# EAGLE board SampleHolder5oa_PRODUCTION_JUSTHOLES (EAGLE 5.10)
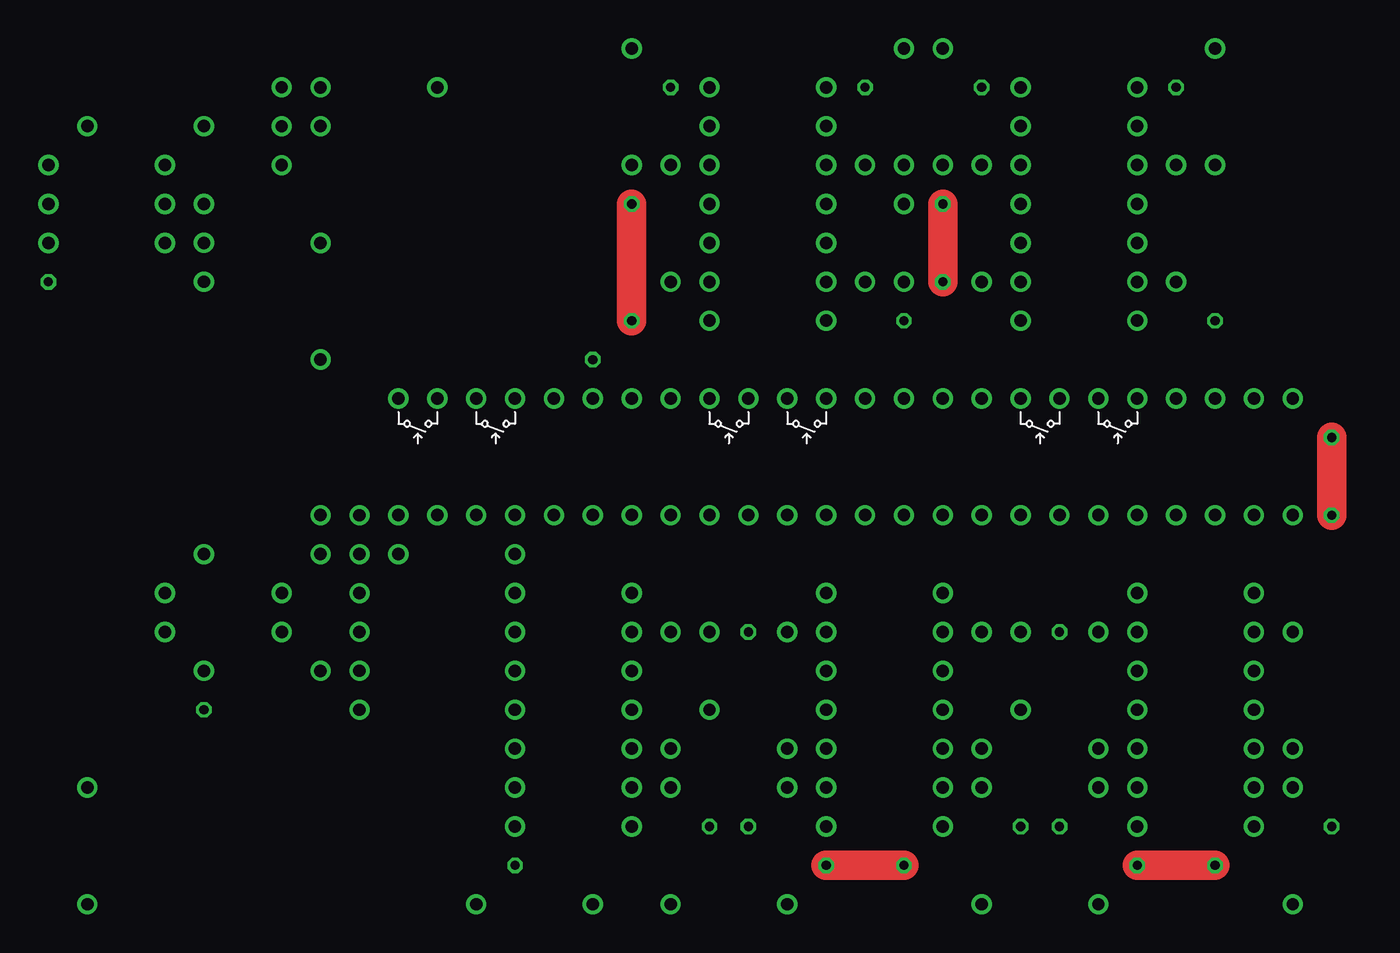
[diagram p0: board, top side]
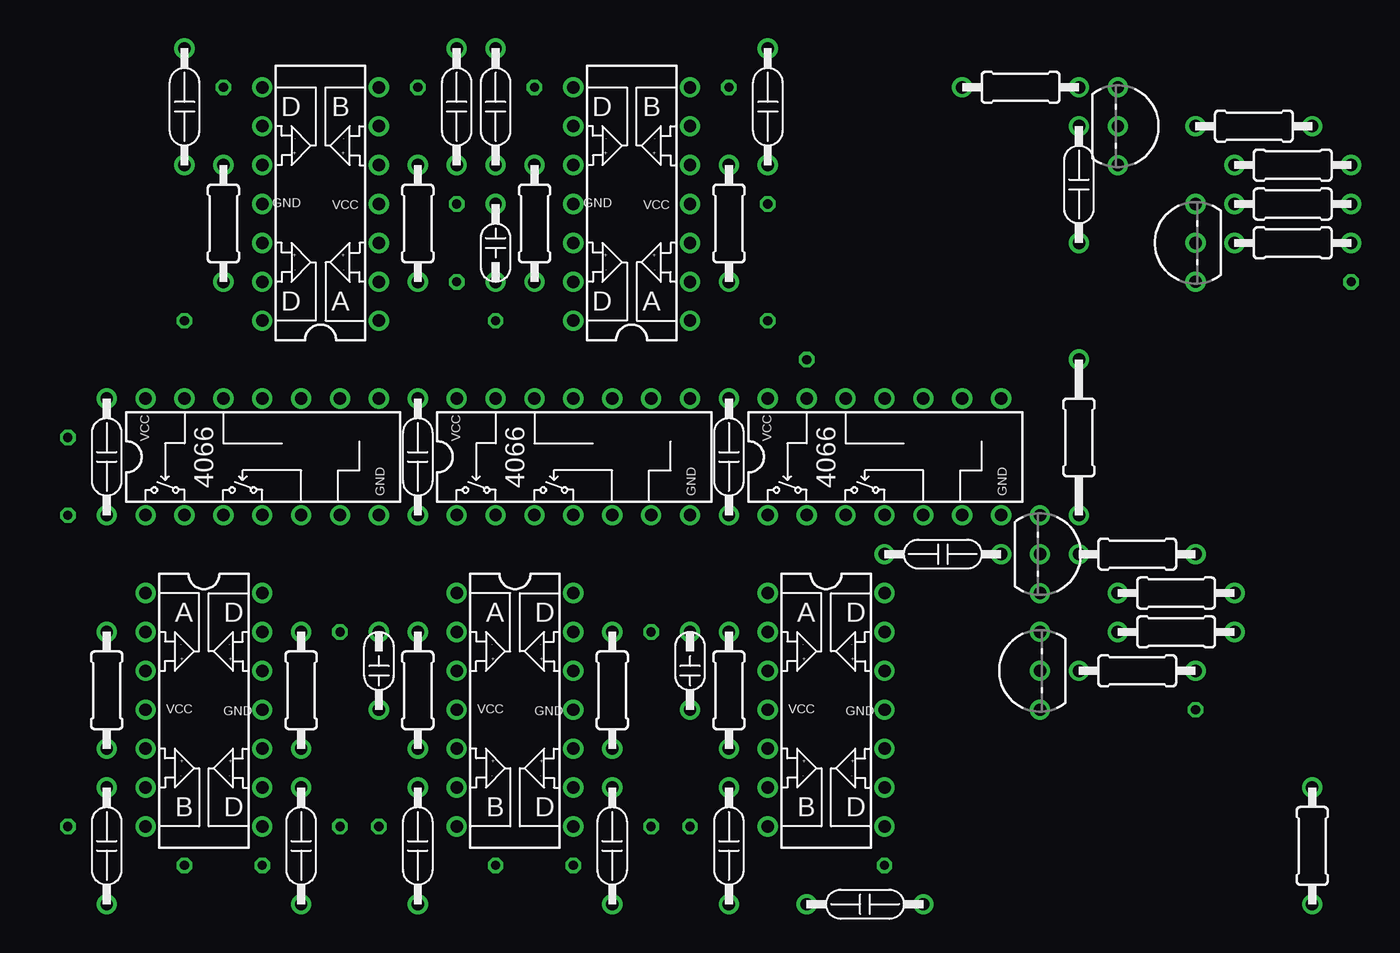
[diagram p1: board, bottom side, seen from below]

No outline drawn. Coordinates in mm, seen from the top.
Copper layers (1*16): Top 0.035mm / dielectric 1.5mm / Bottom 0.035mm
Design rules "default": minimum track width 10mil, minimum drill 24mil, track to track 8mil, track to pad 8mil, pad to pad 8mil, via to via 8mil, smd to smd 8mil, copper to edge 40mil, drill to drill 8mil, minimum pad ring 10mil, minimum via ring 8mil, stop-mask expansion 4mil, vias tented up to drill 0mil, thermal gap 10mil

## Footprints (pad centres in the part's own frame; a part is rotated, then mirrored left to right if it is on the bottom)
SMALL-CAPACITOR = drill 0.813 round: IN1 0,0; IN2 5.08,0
RESISTOR = drill 0.813 round: IN1 -3.81,0; IN2 3.81,0
TRANSISTOR = drill 0.8 round: P$1 0,0; P$2 2.54,0; P$3 -2.54,0
LM324-QUAD-OPAMP = drill 0.813 round: AMINUS -3.81,5.08; AOUT -3.81,7.62; APLUS -3.81,2.54; BMINUS -3.81,-5.08; BOUT -3.81,-7.62; BPLUS -3.81,-2.54; CMINUS 3.81,5.08; COUT 3.81,7.62; CPLUS 3.81,2.54; DMINUS 3.81,-5.08; DOUT 3.81,-7.62; DPLUS 3.81,-2.54; GND 3.81,0; VCC -3.81,0
CAPACITOR = drill 0.813 round: IN1 -2.54,0; IN2 5.08,0
4066-QUAD-SW = drill 0.813 round: A1 -3.81,7.62; A2 -3.81,2.54; A3 3.81,-5.08; A4 3.81,0; B1 -3.81,5.08; B2 -3.81,0; B3 3.81,-7.62; B4 3.81,-2.54; C1 3.81,5.08; C2 -3.81,-2.54; C3 -3.81,-5.08; C4 3.81,2.54; GND -3.81,-7.62; VCC 3.81,7.62
RESISTOR-L2 = drill 0.813 round: IN1 -5.08,0; IN2 5.08,0

## Placement (x,y rotation side)
E$1  [SMALL-CAPACITOR]  59.69,52.07 270 bottom
E$2  [RESISTOR]  6.35,10.16 90 bottom
E$3  [TRANSISTOR]  19.05,57.15 270 bottom
E$4  [TRANSISTOR]  13.97,49.53 90 bottom
E$5  [LM324-QUAD-OPAMP]  38.1,19.05 0 bottom
E$6  2k  [RESISTOR]  10.16,57.15 0 bottom
E$7  [RESISTOR]  44.45,20.32 90 bottom
E$8  10k  [RESISTOR]  7.62,54.61 0 bottom
E$9  [CAPACITOR]  44.45,11.43 270 bottom
E$10  [4066-QUAD-SW]  54.61,35.56 90 bottom
E$11  [LM324-QUAD-OPAMP]  50.8,52.07 180 bottom
E$12  [RESISTOR]  57.15,50.8 270 bottom
E$13  [RESISTOR]  44.45,50.8 270 bottom
E$14  [CAPACITOR]  59.69,57.15 90 bottom
E$15  [4066-QUAD-SW]  34.29,35.56 90 bottom
E$16  [CAPACITOR]  36.83,6.35 0 bottom
E$17  [CAPACITOR]  41.91,57.15 90 bottom
E$18  [LM324-QUAD-OPAMP]  58.42,19.05 0 bottom
E$19  [RESISTOR]  52.07,20.32 90 bottom
E$20  [RESISTOR]  64.77,20.32 90 bottom
E$21  [CAPACITOR]  52.07,11.43 270 bottom
E$22  [CAPACITOR]  64.77,11.43 270 bottom
E$23  [4066-QUAD-SW]  74.93,35.56 90 bottom
E$24  [LM324-QUAD-OPAMP]  71.12,52.07 180 bottom
E$25  [RESISTOR]  77.47,50.8 270 bottom
E$26  [RESISTOR]  64.77,50.8 270 bottom
E$27  [CAPACITOR]  80.01,57.15 90 bottom
E$28  [CAPACITOR]  62.23,57.15 90 bottom
E$29  [LM324-QUAD-OPAMP]  78.74,19.05 0 bottom
E$30  [RESISTOR]  72.39,20.32 90 bottom
E$31  [RESISTOR]  85.09,20.32 90 bottom
E$32  [CAPACITOR]  72.39,11.43 270 bottom
E$33  [CAPACITOR]  85.09,11.43 270 bottom
E$34  [CAPACITOR]  64.77,36.83 270 bottom
E$35  [CAPACITOR]  44.45,36.83 270 bottom
E$36  [CAPACITOR]  85.09,36.83 270 bottom
E$37  [SMALL-CAPACITOR]  46.99,19.05 90 bottom
E$38  [SMALL-CAPACITOR]  67.31,19.05 90 bottom
E$39  2k  [RESISTOR]  25.4,59.69 180 bottom
E$40  [RESISTOR-L2]  21.59,36.83 90 bottom
E$41  10k  [RESISTOR]  7.62,49.53 0 bottom
E$42  10k  [RESISTOR]  7.62,52.07 0 bottom
E$43  [TRANSISTOR]  24.13,29.21 270 bottom
E$44  [TRANSISTOR]  24.13,21.59 90 bottom
E$45  2k  [RESISTOR]  17.78,29.21 0 bottom
E$46  10k  [RESISTOR]  15.24,26.67 0 bottom
E$48  [CAPACITOR]  29.21,29.21 180 bottom
E$49  10k  [RESISTOR]  17.78,21.59 0 bottom
E$50  10k  [RESISTOR]  15.24,24.13 0 bottom
E$51  [CAPACITOR]  21.59,54.61 270 bottom

## Library data of the parts
E$1-E$46 E$48-E$51 = RussellLibrary

## Nets
S$14: E$41.IN2

## Tracks (layer width: path | path; a pad name or v marks a point on that pad's centre or on a via)
S$3  (via drill 0.6)
  other vias: 13.97,19.05
S$6  (via drill 0.6)
  other vias: 3.81,46.99
S$9  (via drill 0.6)
  other vias: 34.29,8.89
S$14  (via drill 0.6)
  other vias: 3.81,49.53
S$16  (via drill 0.6)
  other vias: 46.99,11.43
S$17  (via drill 0.6)
  other vias: 49.53,24.13
S$18  (via drill 0.6)
  other vias: 59.69,44.45
S$19  (via drill 0.6)
  Top 1.93: v54.61,8.89 v59.69,8.89
S$24  (via drill 0.6)
  other vias: 44.45,59.69
S$32  (via drill 0.6)
  other vias: 64.77,59.69
S$39  (via drill 0.6)
  other vias: 39.37,41.91
S$41  (via drill 0.6)
  other vias: 49.53,11.43
S$42  (via drill 0.6)
  Top 1.93: v41.91,44.45 v41.91,52.07
S$43  (via drill 0.6)
  Top 1.93: v62.23,46.99 v62.23,52.07
S$45  (via drill 0.6)
  Top 1.93: v87.63,31.75 v87.63,36.83
S$46  (via drill 0.6)
  other vias: 67.31,11.43
S$47  (via drill 0.6)
  other vias: 57.15,59.69
S$48  (via drill 0.6)
  other vias: 69.85,24.13
S$49  (via drill 0.6)
  other vias: 80.01,44.45
S$50  (via drill 0.6)
  Top 1.93: v74.93,8.89 v80.01,8.89
S$51  (via drill 0.6)
  other vias: 77.47,59.69
S$71  (via drill 0.6)
  other vias: 69.85,11.43
S$73  (via drill 0.6)
  other vias: 87.63,11.43